# EAGLE board Robotic_Finger_Sensor-Panel (EAGLE 9.0.1), part 1 of 2
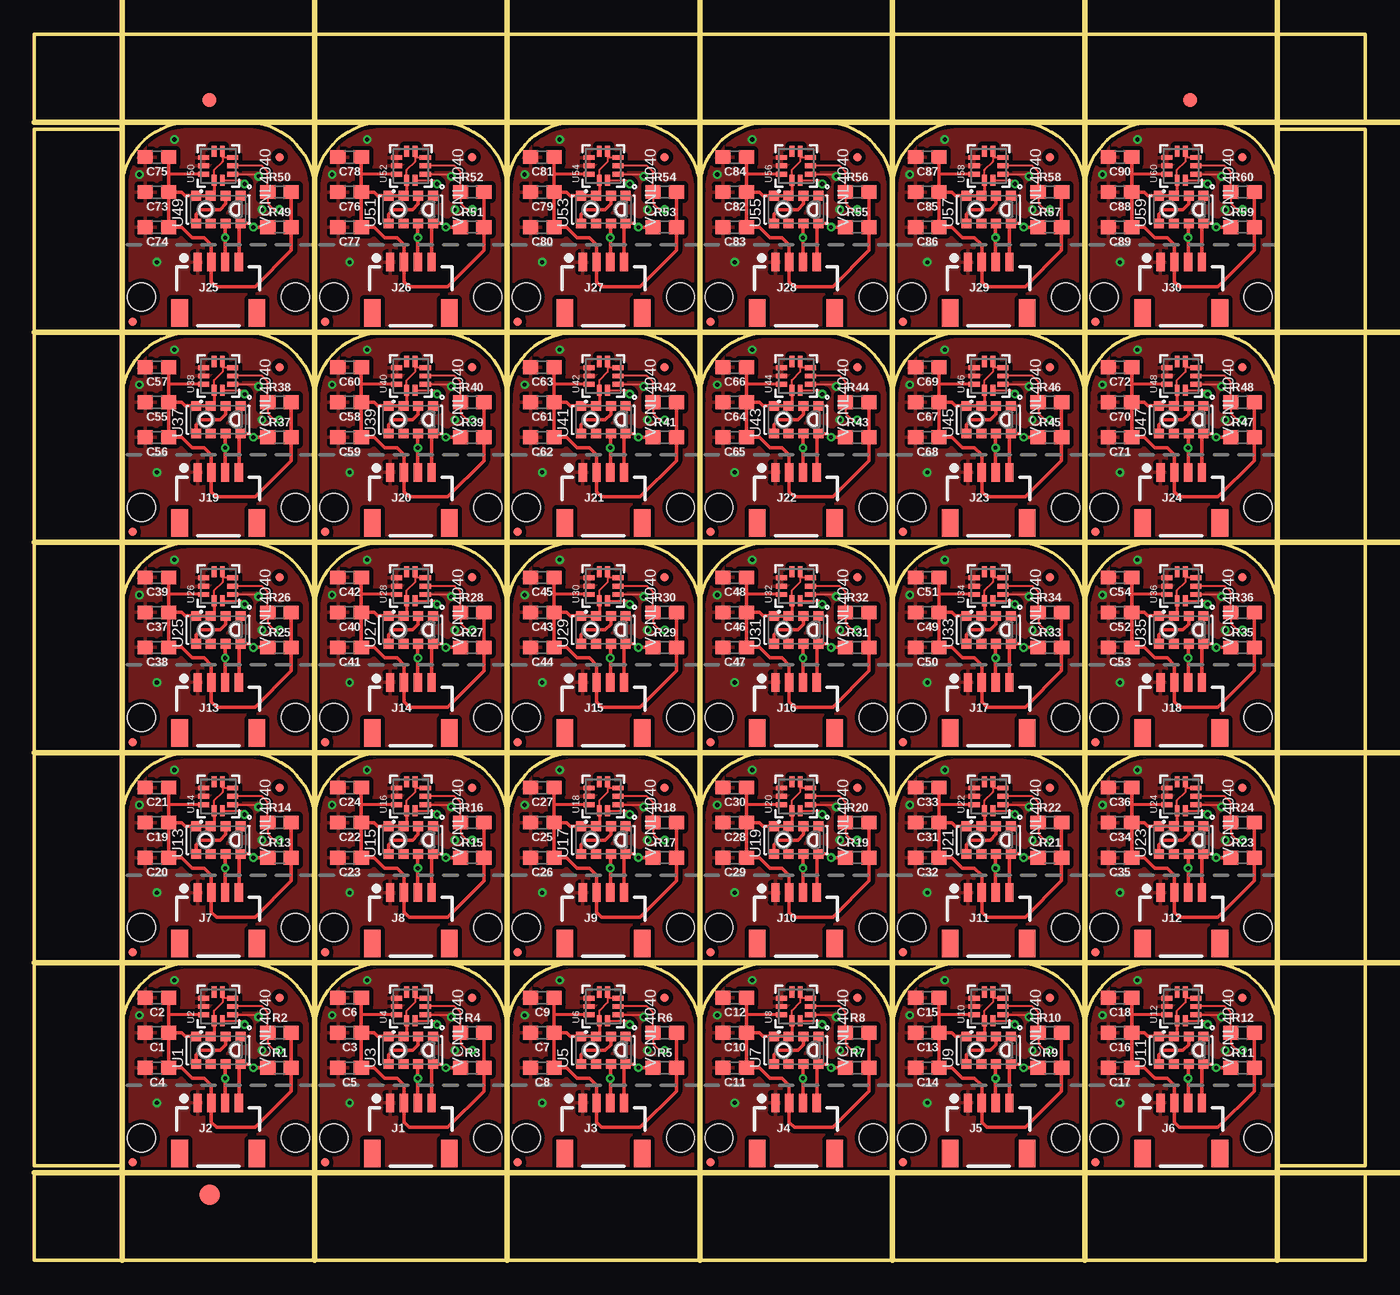
[diagram p0: board, top side]
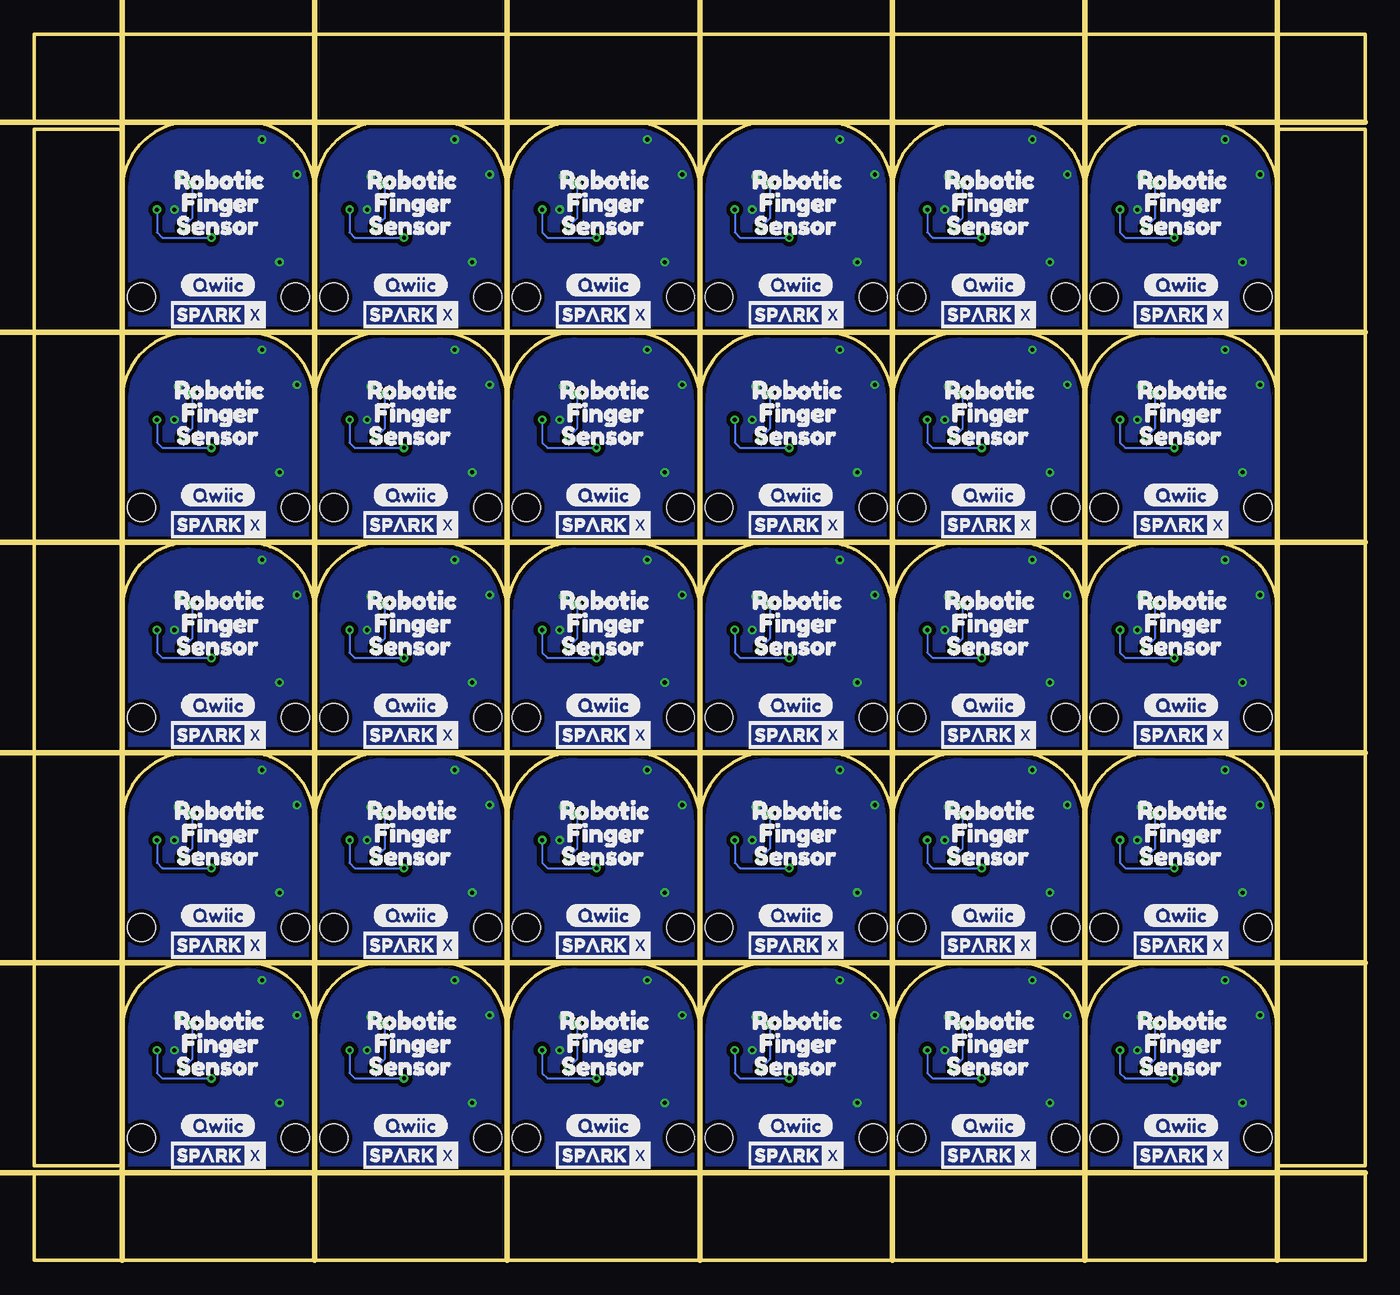
[diagram p1: board, bottom side, seen from below]

Size 96.52 x 88.9 mm. Coordinates in mm from the lower left corner, seen from the top.
Outline: 20.32,6.35 6.35,6.35 6.35,6.86
Outline: 6.35,6.86 6.35,16.51 arc-92 11.43,21.59 15.24,21.59 arc-92 20.32,16.51
Outline: 20.32,6.35 34.29,6.35
Outline: 20.32,6.35 20.32,16.51
Outline: 20.32,16.51 arc-92 25.4,21.59 29.21,21.59 arc-92 34.29,16.51
Outline: 34.29,6.35 48.26,6.35
Outline: 34.29,6.35 34.29,16.51
Outline: 34.29,16.51 arc-92 39.37,21.59 43.18,21.59 arc-92 48.26,16.51
Outline: 48.26,6.35 62.23,6.35
Outline: 48.26,6.35 48.26,16.51
Outline: 48.26,16.51 arc-92 53.34,21.59 57.15,21.59 arc-92 62.23,16.51
Outline: 62.23,6.35 76.2,6.35
Outline: 62.23,6.35 62.23,16.51
Outline: 62.23,16.51 arc-92 67.31,21.59 71.12,21.59 arc-92 76.2,16.51
Outline: 76.2,6.35 90.17,6.35 90.17,6.86
Outline: 76.2,6.35 76.2,16.51
Outline: 90.17,6.86 90.17,16.51 arc92 85.09,21.59 81.28,21.59 arc92 76.2,16.51
Outline: 20.32,21.59 6.35,21.59 6.35,31.75 arc-92 11.43,36.83 15.24,36.83 arc-92 20.32,31.75
Outline: 20.32,21.59 34.29,21.59
Outline: 20.32,21.59 20.32,31.75
Outline: 20.32,31.75 arc-92 25.4,36.83 29.21,36.83 arc-92 34.29,31.75
Outline: 34.29,21.59 48.26,21.59
Outline: 34.29,21.59 34.29,31.75
Outline: 34.29,31.75 arc-92 39.37,36.83 43.18,36.83 arc-92 48.26,31.75
Outline: 48.26,21.59 62.23,21.59
Outline: 48.26,21.59 48.26,31.75
Outline: 48.26,31.75 arc-92 53.34,36.83 57.15,36.83 arc-92 62.23,31.75
Outline: 62.23,21.59 76.2,21.59
Outline: 62.23,21.59 62.23,31.75
Outline: 62.23,31.75 arc-92 67.31,36.83 71.12,36.83 arc-92 76.2,31.75
Outline: 76.2,21.59 90.17,21.59 90.17,31.75 arc92 85.09,36.83 81.28,36.83 arc92 76.2,31.75
Outline: 76.2,21.59 76.2,31.75
Outline: 20.32,36.83 6.35,36.83 6.35,46.99 arc-92 11.43,52.07 15.24,52.07 arc-92 20.32,46.99
Outline: 20.32,36.83 34.29,36.83
Outline: 20.32,36.83 20.32,46.99
Outline: 20.32,46.99 arc-92 25.4,52.07 29.21,52.07 arc-92 34.29,46.99
Outline: 34.29,36.83 48.26,36.83
Outline: 34.29,36.83 34.29,46.99
Outline: 34.29,46.99 arc-92 39.37,52.07 43.18,52.07 arc-92 48.26,46.99
Outline: 48.26,36.83 62.23,36.83
Outline: 48.26,36.83 48.26,46.99
Outline: 48.26,46.99 arc-92 53.34,52.07 57.15,52.07 arc-92 62.23,46.99
Outline: 62.23,36.83 76.2,36.83
Outline: 62.23,36.83 62.23,46.99
Outline: 62.23,46.99 arc-92 67.31,52.07 71.12,52.07 arc-92 76.2,46.99
Outline: 76.2,36.83 90.17,36.83 90.17,46.99 arc92 85.09,52.07 81.28,52.07 arc92 76.2,46.99
Outline: 76.2,36.83 76.2,46.99
Outline: 20.32,52.07 6.35,52.07 6.35,62.23 arc-92 11.43,67.31 15.24,67.31 arc-92 20.32,62.23
Outline: 20.32,52.07 34.29,52.07
Outline: 20.32,52.07 20.32,62.23
Outline: 20.32,62.23 arc-92 25.4,67.31 29.21,67.31 arc-92 34.29,62.23
Outline: 34.29,52.07 48.26,52.07
Outline: 34.29,52.07 34.29,62.23
Outline: 34.29,62.23 arc-92 39.37,67.31 43.18,67.31 arc-92 48.26,62.23
Outline: 48.26,52.07 62.23,52.07
Outline: 48.26,52.07 48.26,62.23
Outline: 48.26,62.23 arc-92 53.34,67.31 57.15,67.31 arc-92 62.23,62.23
Outline: 62.23,52.07 76.2,52.07
Outline: 62.23,52.07 62.23,62.23
Outline: 62.23,62.23 arc-92 67.31,67.31 71.12,67.31 arc-92 76.2,62.23
Outline: 76.2,52.07 90.17,52.07 90.17,62.23 arc92 85.09,67.31 81.28,67.31 arc92 76.2,62.23
Outline: 76.2,52.07 76.2,62.23
Outline: 20.32,67.31 6.35,67.31 6.35,77.47 arc-92 11.43,82.55 15.24,82.55 arc-92 20.32,77.47
Outline: 20.32,67.31 34.29,67.31
Outline: 20.32,67.31 20.32,77.47
Outline: 20.32,77.47 arc-92 25.4,82.55 29.21,82.55 arc-92 34.29,77.47
Outline: 34.29,67.31 48.26,67.31
Outline: 34.29,67.31 34.29,77.47
Outline: 34.29,77.47 arc-92 39.37,82.55 43.18,82.55 arc-92 48.26,77.47
Outline: 48.26,67.31 62.23,67.31
Outline: 48.26,67.31 48.26,77.47
Outline: 48.26,77.47 arc-92 53.34,82.55 57.15,82.55 arc-92 62.23,77.47
Outline: 62.23,67.31 76.2,67.31
Outline: 62.23,67.31 62.23,77.47
Outline: 62.23,77.47 arc-92 67.31,82.55 71.12,82.55 arc-92 76.2,77.47
Outline: 76.2,67.31 90.17,67.31 90.17,77.47 arc92 85.09,82.55 81.28,82.55 arc92 76.2,77.47
Outline: 76.2,67.31 76.2,77.47
Outline: 90.17,6.86 96.52,6.86 96.52,82.04 90.17,82.04 90.17,6.86
Outline: 6.35,6.86 6.35,82.04 0,82.04 0,6.86 6.35,6.86
Outline: 0,6.35 96.52,6.35 96.52,0 0,0 0,6.35
Outline: 0,88.9 96.52,88.9 96.52,82.55 0,82.55 0,88.9
Copper layers (1*16): Top 0.035mm / dielectric 1.5mm / Bottom 0.035mm
Design rules "SparkFun-2-layer-PCBWay-LIMIT": minimum track width 6mil, minimum drill 0.3mm, track to track 6mil, track to pad 6mil, pad to pad 6mil, via to via 6mil, smd to smd 6mil, copper to edge 6mil, drill to drill 6mil, minimum pad ring 6mil, minimum via ring 6mil, stop-mask expansion 4mil, vias tented up to drill 25mil, thermal gap 10mil
Milling: 13 lines

## Footprints (pad centres in the part's own frame; a part is rotated, then mirrored left to right if it is on the bottom)
0603 = smd 1.1 x 1: 1 -0.85,0; 2 0.85,0
FIDUCIAL-1X2 = smd 1 x 1: 1 0,0
FIDUCIAL-1.5X3 = smd 1.5 x 1.5: 1 0,0
FIDUCIAL-MICRO = smd 0.635 x 0.635: 1 0,0
1X04_1MM_RA = smd 0.6 x 1.35: 1 -1.5,0; 2 -0.5,0; 3 0.5,0; 4 1.5,0 | smd 1.2 x 2: NC1 2.8,-3.675; NC2 -2.8,-3.675
VCNL4040 = smd 0.7 x 0.725: 1 1,-1.613; 2 1,-0.537; 3 1,0.537; 4 1,1.613; 5 -1,1.613; 6 -1,0.537; 7 -1,-0.537; 8 -1,-1.613
LPS25HB = smd 0.8 x 0.35: 1 -1.05,0.3; 2 -1.05,-0.3; 6 1.05,-0.3; 7 1.05,0.3 | smd 0.35 x 0.8: 3 -0.6,-1.05; 4 0,-1.05; 5 0.6,-1.05; 8 0.6,1.05; 9 0,1.05; 10 -0.6,1.05
STAND-OFF-#2 = hole 2.032: 0,0

## Placement (x,y rotation side)
C1  4.7uF  [0603]  8.89,16.51 180 top
C2  0.1uF  [0603]  8.89,19.05 180 top
C3  4.7uF  [0603]  22.86,16.51 180 top
C4  0.1uF  [0603]  8.89,13.97 180 top
C5  0.1uF  [0603]  22.86,13.97 180 top
C6  0.1uF  [0603]  22.86,19.05 180 top
C7  4.7uF  [0603]  36.83,16.51 180 top
C8  0.1uF  [0603]  36.83,13.97 180 top
C9  0.1uF  [0603]  36.83,19.05 180 top
C10  4.7uF  [0603]  50.8,16.51 180 top
C11  0.1uF  [0603]  50.8,13.97 180 top
C12  0.1uF  [0603]  50.8,19.05 180 top
C13  4.7uF  [0603]  64.77,16.51 180 top
C14  0.1uF  [0603]  64.77,13.97 180 top
C15  0.1uF  [0603]  64.77,19.05 180 top
C16  4.7uF  [0603]  78.74,16.51 180 top
C17  0.1uF  [0603]  78.74,13.97 180 top
C18  0.1uF  [0603]  78.74,19.05 180 top
C19  4.7uF  [0603]  8.89,31.75 180 top
C20  0.1uF  [0603]  8.89,29.21 180 top
C21  0.1uF  [0603]  8.89,34.29 180 top
C22  4.7uF  [0603]  22.86,31.75 180 top
C23  0.1uF  [0603]  22.86,29.21 180 top
C24  0.1uF  [0603]  22.86,34.29 180 top
C25  4.7uF  [0603]  36.83,31.75 180 top
C26  0.1uF  [0603]  36.83,29.21 180 top
C27  0.1uF  [0603]  36.83,34.29 180 top
C28  4.7uF  [0603]  50.8,31.75 180 top
C29  0.1uF  [0603]  50.8,29.21 180 top
C30  0.1uF  [0603]  50.8,34.29 180 top
C31  4.7uF  [0603]  64.77,31.75 180 top
C32  0.1uF  [0603]  64.77,29.21 180 top
C33  0.1uF  [0603]  64.77,34.29 180 top
C34  4.7uF  [0603]  78.74,31.75 180 top
C35  0.1uF  [0603]  78.74,29.21 180 top
C36  0.1uF  [0603]  78.74,34.29 180 top
C37  4.7uF  [0603]  8.89,46.99 180 top
C38  0.1uF  [0603]  8.89,44.45 180 top
C39  0.1uF  [0603]  8.89,49.53 180 top
C40  4.7uF  [0603]  22.86,46.99 180 top
C41  0.1uF  [0603]  22.86,44.45 180 top
C42  0.1uF  [0603]  22.86,49.53 180 top
C43  4.7uF  [0603]  36.83,46.99 180 top
C44  0.1uF  [0603]  36.83,44.45 180 top
C45  0.1uF  [0603]  36.83,49.53 180 top
C46  4.7uF  [0603]  50.8,46.99 180 top
C47  0.1uF  [0603]  50.8,44.45 180 top
C48  0.1uF  [0603]  50.8,49.53 180 top
C49  4.7uF  [0603]  64.77,46.99 180 top
C50  0.1uF  [0603]  64.77,44.45 180 top
C51  0.1uF  [0603]  64.77,49.53 180 top
C52  4.7uF  [0603]  78.74,46.99 180 top
C53  0.1uF  [0603]  78.74,44.45 180 top
C54  0.1uF  [0603]  78.74,49.53 180 top
C55  4.7uF  [0603]  8.89,62.23 180 top
C56  0.1uF  [0603]  8.89,59.69 180 top
C57  0.1uF  [0603]  8.89,64.77 180 top
C58  4.7uF  [0603]  22.86,62.23 180 top
C59  0.1uF  [0603]  22.86,59.69 180 top
C60  0.1uF  [0603]  22.86,64.77 180 top
C61  4.7uF  [0603]  36.83,62.23 180 top
C62  0.1uF  [0603]  36.83,59.69 180 top
C63  0.1uF  [0603]  36.83,64.77 180 top
C64  4.7uF  [0603]  50.8,62.23 180 top
C65  0.1uF  [0603]  50.8,59.69 180 top
C66  0.1uF  [0603]  50.8,64.77 180 top
C67  4.7uF  [0603]  64.77,62.23 180 top
C68  0.1uF  [0603]  64.77,59.69 180 top
C69  0.1uF  [0603]  64.77,64.77 180 top
C70  4.7uF  [0603]  78.74,62.23 180 top
C71  0.1uF  [0603]  78.74,59.69 180 top
C72  0.1uF  [0603]  78.74,64.77 180 top
C73  4.7uF  [0603]  8.89,77.47 180 top
C74  0.1uF  [0603]  8.89,74.93 180 top
C75  0.1uF  [0603]  8.89,80.01 180 top
C76  4.7uF  [0603]  22.86,77.47 180 top
C77  0.1uF  [0603]  22.86,74.93 180 top
C78  0.1uF  [0603]  22.86,80.01 180 top
C79  4.7uF  [0603]  36.83,77.47 180 top
C80  0.1uF  [0603]  36.83,74.93 180 top
C81  0.1uF  [0603]  36.83,80.01 180 top
C82  4.7uF  [0603]  50.8,77.47 180 top
C83  0.1uF  [0603]  50.8,74.93 180 top
C84  0.1uF  [0603]  50.8,80.01 180 top
C85  4.7uF  [0603]  64.77,77.47 180 top
C86  0.1uF  [0603]  64.77,74.93 180 top
C87  0.1uF  [0603]  64.77,80.01 180 top
C88  4.7uF  [0603]  78.74,77.47 180 top
C89  0.1uF  [0603]  78.74,74.93 180 top
C90  0.1uF  [0603]  78.74,80.01 180 top
E$1  [FIDUCIAL-1X2]  12.7,84.14 0 top
E$2  [FIDUCIAL-1X2]  83.82,84.14 0 top
E$3  [FIDUCIAL-1.5X3]  12.7,4.76 0 top
FD1  FIDUCIALUFIDUCIAL  [FIDUCIAL-MICRO]  17.78,19.05 0 top
FD2  FIDUCIALUFIDUCIAL  [FIDUCIAL-MICRO]  7.11,7.11 0 top
FD3  FIDUCIALUFIDUCIAL  [FIDUCIAL-MICRO]  31.75,19.05 0 top
FD4  FIDUCIALUFIDUCIAL  [FIDUCIAL-MICRO]  21.08,7.11 0 top
FD5  FIDUCIALUFIDUCIAL  [FIDUCIAL-MICRO]  45.72,19.05 0 top
FD6  FIDUCIALUFIDUCIAL  [FIDUCIAL-MICRO]  35.05,7.11 0 top
FD7  FIDUCIALUFIDUCIAL  [FIDUCIAL-MICRO]  59.69,19.05 0 top
FD8  FIDUCIALUFIDUCIAL  [FIDUCIAL-MICRO]  49.02,7.11 0 top
FD9  FIDUCIALUFIDUCIAL  [FIDUCIAL-MICRO]  73.66,19.05 0 top
FD10  FIDUCIALUFIDUCIAL  [FIDUCIAL-MICRO]  62.99,7.11 0 top
FD11  FIDUCIALUFIDUCIAL  [FIDUCIAL-MICRO]  87.63,19.05 0 top
FD12  FIDUCIALUFIDUCIAL  [FIDUCIAL-MICRO]  76.96,7.11 0 top
FD13  FIDUCIALUFIDUCIAL  [FIDUCIAL-MICRO]  17.78,34.29 0 top
FD14  FIDUCIALUFIDUCIAL  [FIDUCIAL-MICRO]  7.11,22.35 0 top
FD15  FIDUCIALUFIDUCIAL  [FIDUCIAL-MICRO]  31.75,34.29 0 top
FD16  FIDUCIALUFIDUCIAL  [FIDUCIAL-MICRO]  21.08,22.35 0 top
FD17  FIDUCIALUFIDUCIAL  [FIDUCIAL-MICRO]  45.72,34.29 0 top
FD18  FIDUCIALUFIDUCIAL  [FIDUCIAL-MICRO]  35.05,22.35 0 top
FD19  FIDUCIALUFIDUCIAL  [FIDUCIAL-MICRO]  59.69,34.29 0 top
FD20  FIDUCIALUFIDUCIAL  [FIDUCIAL-MICRO]  49.02,22.35 0 top
FD21  FIDUCIALUFIDUCIAL  [FIDUCIAL-MICRO]  73.66,34.29 0 top
FD22  FIDUCIALUFIDUCIAL  [FIDUCIAL-MICRO]  62.99,22.35 0 top
FD23  FIDUCIALUFIDUCIAL  [FIDUCIAL-MICRO]  87.63,34.29 0 top
FD24  FIDUCIALUFIDUCIAL  [FIDUCIAL-MICRO]  76.96,22.35 0 top
FD25  FIDUCIALUFIDUCIAL  [FIDUCIAL-MICRO]  17.78,49.53 0 top
FD26  FIDUCIALUFIDUCIAL  [FIDUCIAL-MICRO]  7.11,37.59 0 top
FD27  FIDUCIALUFIDUCIAL  [FIDUCIAL-MICRO]  31.75,49.53 0 top
FD28  FIDUCIALUFIDUCIAL  [FIDUCIAL-MICRO]  21.08,37.59 0 top
FD29  FIDUCIALUFIDUCIAL  [FIDUCIAL-MICRO]  45.72,49.53 0 top
FD30  FIDUCIALUFIDUCIAL  [FIDUCIAL-MICRO]  35.05,37.59 0 top
FD31  FIDUCIALUFIDUCIAL  [FIDUCIAL-MICRO]  59.69,49.53 0 top
FD32  FIDUCIALUFIDUCIAL  [FIDUCIAL-MICRO]  49.02,37.59 0 top
FD33  FIDUCIALUFIDUCIAL  [FIDUCIAL-MICRO]  73.66,49.53 0 top
FD34  FIDUCIALUFIDUCIAL  [FIDUCIAL-MICRO]  62.99,37.59 0 top
FD35  FIDUCIALUFIDUCIAL  [FIDUCIAL-MICRO]  87.63,49.53 0 top
FD36  FIDUCIALUFIDUCIAL  [FIDUCIAL-MICRO]  76.96,37.59 0 top
FD37  FIDUCIALUFIDUCIAL  [FIDUCIAL-MICRO]  17.78,64.77 0 top
FD38  FIDUCIALUFIDUCIAL  [FIDUCIAL-MICRO]  7.11,52.83 0 top
FD39  FIDUCIALUFIDUCIAL  [FIDUCIAL-MICRO]  31.75,64.77 0 top
FD40  FIDUCIALUFIDUCIAL  [FIDUCIAL-MICRO]  21.08,52.83 0 top
FD41  FIDUCIALUFIDUCIAL  [FIDUCIAL-MICRO]  45.72,64.77 0 top
FD42  FIDUCIALUFIDUCIAL  [FIDUCIAL-MICRO]  35.05,52.83 0 top
FD43  FIDUCIALUFIDUCIAL  [FIDUCIAL-MICRO]  59.69,64.77 0 top
FD44  FIDUCIALUFIDUCIAL  [FIDUCIAL-MICRO]  49.02,52.83 0 top
FD45  FIDUCIALUFIDUCIAL  [FIDUCIAL-MICRO]  73.66,64.77 0 top
FD46  FIDUCIALUFIDUCIAL  [FIDUCIAL-MICRO]  62.99,52.83 0 top
FD47  FIDUCIALUFIDUCIAL  [FIDUCIAL-MICRO]  87.63,64.77 0 top
FD48  FIDUCIALUFIDUCIAL  [FIDUCIAL-MICRO]  76.96,52.83 0 top
FD49  FIDUCIALUFIDUCIAL  [FIDUCIAL-MICRO]  17.78,80.01 0 top
FD50  FIDUCIALUFIDUCIAL  [FIDUCIAL-MICRO]  7.11,68.07 0 top
FD51  FIDUCIALUFIDUCIAL  [FIDUCIAL-MICRO]  31.75,80.01 0 top
FD52  FIDUCIALUFIDUCIAL  [FIDUCIAL-MICRO]  21.08,68.07 0 top
FD53  FIDUCIALUFIDUCIAL  [FIDUCIAL-MICRO]  45.72,80.01 0 top
FD54  FIDUCIALUFIDUCIAL  [FIDUCIAL-MICRO]  35.05,68.07 0 top
FD55  FIDUCIALUFIDUCIAL  [FIDUCIAL-MICRO]  59.69,80.01 0 top
FD56  FIDUCIALUFIDUCIAL  [FIDUCIAL-MICRO]  49.02,68.07 0 top
FD57  FIDUCIALUFIDUCIAL  [FIDUCIAL-MICRO]  73.66,80.01 0 top
FD58  FIDUCIALUFIDUCIAL  [FIDUCIAL-MICRO]  62.99,68.07 0 top
FD59  FIDUCIALUFIDUCIAL  [FIDUCIAL-MICRO]  87.63,80.01 0 top
FD60  FIDUCIALUFIDUCIAL  [FIDUCIAL-MICRO]  76.96,68.07 0 top
J1  [1X04_1MM_RA]  27.3,11.43 0 top
J2  [1X04_1MM_RA]  13.34,11.43 0 top
J3  [1X04_1MM_RA]  41.27,11.43 0 top
J4  [1X04_1MM_RA]  55.25,11.43 0 top
J5  [1X04_1MM_RA]  69.22,11.43 0 top
J6  [1X04_1MM_RA]  83.18,11.43 0 top
J7  [1X04_1MM_RA]  13.34,26.67 0 top
J8  [1X04_1MM_RA]  27.3,26.67 0 top
J9  [1X04_1MM_RA]  41.27,26.67 0 top
J10  [1X04_1MM_RA]  55.25,26.67 0 top
J11  [1X04_1MM_RA]  69.22,26.67 0 top
J12  [1X04_1MM_RA]  83.18,26.67 0 top
J13  [1X04_1MM_RA]  13.34,41.91 0 top
J14  [1X04_1MM_RA]  27.3,41.91 0 top
J15  [1X04_1MM_RA]  41.27,41.91 0 top
J16  [1X04_1MM_RA]  55.25,41.91 0 top
J17  [1X04_1MM_RA]  69.22,41.91 0 top
J18  [1X04_1MM_RA]  83.18,41.91 0 top
J19  [1X04_1MM_RA]  13.34,57.15 0 top
J20  [1X04_1MM_RA]  27.3,57.15 0 top
J21  [1X04_1MM_RA]  41.27,57.15 0 top
J22  [1X04_1MM_RA]  55.25,57.15 0 top
J23  [1X04_1MM_RA]  69.22,57.15 0 top
J24  [1X04_1MM_RA]  83.18,57.15 0 top
J25  [1X04_1MM_RA]  13.34,72.39 0 top
J26  [1X04_1MM_RA]  27.3,72.39 0 top
J27  [1X04_1MM_RA]  41.27,72.39 0 top
J28  [1X04_1MM_RA]  55.25,72.39 0 top
J29  [1X04_1MM_RA]  69.22,72.39 0 top
J30  [1X04_1MM_RA]  83.18,72.39 0 top
R1  2.2k  [0603]  17.78,13.97 0 top
R2  2.2k  [0603]  17.78,16.51 0 top
R3  2.2k  [0603]  31.75,13.97 0 top
R4  2.2k  [0603]  31.75,16.51 0 top
R5  2.2k  [0603]  45.72,13.97 0 top
R6  2.2k  [0603]  45.72,16.51 0 top
R7  2.2k  [0603]  59.69,13.97 0 top
R8  2.2k  [0603]  59.69,16.51 0 top
R9  2.2k  [0603]  73.66,13.97 0 top
R10  2.2k  [0603]  73.66,16.51 0 top
R11  2.2k  [0603]  87.63,13.97 0 top
R12  2.2k  [0603]  87.63,16.51 0 top
R13  2.2k  [0603]  17.78,29.21 0 top
R14  2.2k  [0603]  17.78,31.75 0 top
R15  2.2k  [0603]  31.75,29.21 0 top
R16  2.2k  [0603]  31.75,31.75 0 top
R17  2.2k  [0603]  45.72,29.21 0 top
R18  2.2k  [0603]  45.72,31.75 0 top
R19  2.2k  [0603]  59.69,29.21 0 top
R20  2.2k  [0603]  59.69,31.75 0 top
R21  2.2k  [0603]  73.66,29.21 0 top
R22  2.2k  [0603]  73.66,31.75 0 top
R23  2.2k  [0603]  87.63,29.21 0 top
R24  2.2k  [0603]  87.63,31.75 0 top
R25  2.2k  [0603]  17.78,44.45 0 top
R26  2.2k  [0603]  17.78,46.99 0 top
R27  2.2k  [0603]  31.75,44.45 0 top
R28  2.2k  [0603]  31.75,46.99 0 top
R29  2.2k  [0603]  45.72,44.45 0 top
R30  2.2k  [0603]  45.72,46.99 0 top
R31  2.2k  [0603]  59.69,44.45 0 top
R32  2.2k  [0603]  59.69,46.99 0 top
R33  2.2k  [0603]  73.66,44.45 0 top
R34  2.2k  [0603]  73.66,46.99 0 top
R35  2.2k  [0603]  87.63,44.45 0 top
R36  2.2k  [0603]  87.63,46.99 0 top
R37  2.2k  [0603]  17.78,59.69 0 top
R38  2.2k  [0603]  17.78,62.23 0 top
R39  2.2k  [0603]  31.75,59.69 0 top
R40  2.2k  [0603]  31.75,62.23 0 top
R41  2.2k  [0603]  45.72,59.69 0 top
R42  2.2k  [0603]  45.72,62.23 0 top
R43  2.2k  [0603]  59.69,59.69 0 top
R44  2.2k  [0603]  59.69,62.23 0 top
R45  2.2k  [0603]  73.66,59.69 0 top
R46  2.2k  [0603]  73.66,62.23 0 top
R47  2.2k  [0603]  87.63,59.69 0 top
R48  2.2k  [0603]  87.63,62.23 0 top
R49  2.2k  [0603]  17.78,74.93 0 top
R50  2.2k  [0603]  17.78,77.47 0 top
R51  2.2k  [0603]  31.75,74.93 0 top
R52  2.2k  [0603]  31.75,77.47 0 top
R53  2.2k  [0603]  45.72,74.93 0 top
R54  2.2k  [0603]  45.72,77.47 0 top
R55  2.2k  [0603]  59.69,74.93 0 top
R56  2.2k  [0603]  59.69,77.47 0 top
R57  2.2k  [0603]  73.66,74.93 0 top
R58  2.2k  [0603]  73.66,77.47 0 top
R59  2.2k  [0603]  87.63,74.93 0 top
R60  2.2k  [0603]  87.63,77.47 0 top
U1  VCNL4040  [VCNL4040]  13.34,15.24 90 top
U2  LPS25HB  [LPS25HB]  13.34,18.41 90 top
U3  VCNL4040  [VCNL4040]  27.3,15.24 90 top
U4  LPS25HB  [LPS25HB]  27.3,18.41 90 top
U5  VCNL4040  [VCNL4040]  41.27,15.24 90 top
U6  LPS25HB  [LPS25HB]  41.27,18.41 90 top
U7  VCNL4040  [VCNL4040]  55.25,15.24 90 top
U8  LPS25HB  [LPS25HB]  55.25,18.41 90 top
U9  VCNL4040  [VCNL4040]  69.22,15.24 90 top
U10  LPS25HB  [LPS25HB]  69.22,18.41 90 top
U11  VCNL4040  [VCNL4040]  83.18,15.24 90 top
U12  LPS25HB  [LPS25HB]  83.18,18.41 90 top
U13  VCNL4040  [VCNL4040]  13.34,30.48 90 top
U14  LPS25HB  [LPS25HB]  13.34,33.66 90 top
U15  VCNL4040  [VCNL4040]  27.3,30.48 90 top
U16  LPS25HB  [LPS25HB]  27.3,33.66 90 top
U17  VCNL4040  [VCNL4040]  41.27,30.48 90 top
U18  LPS25HB  [LPS25HB]  41.27,33.66 90 top
U19  VCNL4040  [VCNL4040]  55.25,30.48 90 top
U20  LPS25HB  [LPS25HB]  55.25,33.66 90 top
U21  VCNL4040  [VCNL4040]  69.22,30.48 90 top
U22  LPS25HB  [LPS25HB]  69.22,33.66 90 top
U23  VCNL4040  [VCNL4040]  83.18,30.48 90 top
U24  LPS25HB  [LPS25HB]  83.18,33.66 90 top
U25  VCNL4040  [VCNL4040]  13.34,45.72 90 top
U26  LPS25HB  [LPS25HB]  13.34,48.9 90 top
U27  VCNL4040  [VCNL4040]  27.3,45.72 90 top
U28  LPS25HB  [LPS25HB]  27.3,48.9 90 top
U29  VCNL4040  [VCNL4040]  41.27,45.72 90 top
U30  LPS25HB  [LPS25HB]  41.27,48.9 90 top
U31  VCNL4040  [VCNL4040]  55.25,45.72 90 top
U32  LPS25HB  [LPS25HB]  55.25,48.9 90 top
U33  VCNL4040  [VCNL4040]  69.22,45.72 90 top
U34  LPS25HB  [LPS25HB]  69.22,48.9 90 top
U35  VCNL4040  [VCNL4040]  83.18,45.72 90 top
U36  LPS25HB  [LPS25HB]  83.18,48.9 90 top
U37  VCNL4040  [VCNL4040]  13.34,60.96 90 top
U38  LPS25HB  [LPS25HB]  13.34,64.13 90 top
U39  VCNL4040  [VCNL4040]  27.3,60.96 90 top
U40  LPS25HB  [LPS25HB]  27.3,64.13 90 top
U41  VCNL4040  [VCNL4040]  41.27,60.96 90 top
U42  LPS25HB  [LPS25HB]  41.27,64.13 90 top
U43  VCNL4040  [VCNL4040]  55.25,60.96 90 top
U44  LPS25HB  [LPS25HB]  55.25,64.13 90 top
U45  VCNL4040  [VCNL4040]  69.22,60.96 90 top
U46  LPS25HB  [LPS25HB]  69.22,64.13 90 top
U47  VCNL4040  [VCNL4040]  83.18,60.96 90 top
U48  LPS25HB  [LPS25HB]  83.18,64.13 90 top
U49  VCNL4040  [VCNL4040]  13.34,76.2 90 top
U50  LPS25HB  [LPS25HB]  13.34,79.38 90 top
U51  VCNL4040  [VCNL4040]  27.3,76.2 90 top
U52  LPS25HB  [LPS25HB]  27.3,79.38 90 top
U53  VCNL4040  [VCNL4040]  41.27,76.2 90 top
U54  LPS25HB  [LPS25HB]  41.27,79.38 90 top
U55  VCNL4040  [VCNL4040]  55.25,76.2 90 top
U56  LPS25HB  [LPS25HB]  55.25,79.38 90 top
U57  VCNL4040  [VCNL4040]  69.22,76.2 90 top
U58  LPS25HB  [LPS25HB]  69.22,79.38 90 top
U59  VCNL4040  [VCNL4040]  83.18,76.2 90 top
U60  LPS25HB  [LPS25HB]  83.18,79.38 90 top
U$1  SPARKX-LOGO3  [SPARKX-SMALL]  27.3,7.62 0 bottom
U$2  SPARKX-LOGO3  [SPARKX-SMALL]  13.34,7.62 0 bottom
U$3  STAND-OFF  [STAND-OFF-#2]  7.75,8.89 0 top
U$4  STAND-OFF  [STAND-OFF-#2]  18.92,8.89 0 top
U$5  STAND-OFF  [STAND-OFF-#2]  21.72,8.89 0 top
U$6  [ROBOTIC0]  17.65,17.4 0 bottom
U$7  [SENSOR2]  17.53,14.1 0 bottom
U$8  STAND-OFF  [STAND-OFF-#2]  32.89,8.89 0 top
U$9  [FINGER0]  17.14,15.75 0 bottom
U$10  [(QWIIC)]  30.1,9.78 0 bottom
U$11  [(QWIIC)]  16.13,9.78 0 bottom
U$12  [ROBOTIC0]  31.62,17.4 0 bottom
U$13  [SENSOR2]  31.5,14.1 0 bottom
U$14  [FINGER0]  31.12,15.75 0 bottom
U$15  SPARKX-LOGO3  [SPARKX-SMALL]  41.27,7.62 0 bottom
U$16  STAND-OFF  [STAND-OFF-#2]  35.69,8.89 0 top
U$17  STAND-OFF  [STAND-OFF-#2]  46.86,8.89 0 top
U$18  [(QWIIC)]  44.07,9.78 0 bottom
U$19  [ROBOTIC0]  45.59,17.4 0 bottom
U$20  [SENSOR2]  45.47,14.1 0 bottom
U$21  [FINGER0]  45.09,15.75 0 bottom
U$22  SPARKX-LOGO3  [SPARKX-SMALL]  55.25,7.62 0 bottom
U$23  STAND-OFF  [STAND-OFF-#2]  49.66,8.89 0 top
U$24  STAND-OFF  [STAND-OFF-#2]  60.83,8.89 0 top
U$25  [(QWIIC)]  58.04,9.78 0 bottom
U$26  [ROBOTIC0]  59.56,17.4 0 bottom
U$27  [SENSOR2]  59.44,14.1 0 bottom
U$28  [FINGER0]  59.05,15.75 0 bottom
U$29  SPARKX-LOGO3  [SPARKX-SMALL]  69.22,7.62 0 bottom
U$30  STAND-OFF  [STAND-OFF-#2]  63.63,8.89 0 top
U$31  STAND-OFF  [STAND-OFF-#2]  74.8,8.89 0 top
U$32  [(QWIIC)]  72.01,9.78 0 bottom
U$33  [ROBOTIC0]  73.53,17.4 0 bottom
U$34  [SENSOR2]  73.41,14.1 0 bottom
U$35  [FINGER0]  73.02,15.75 0 bottom
U$36  SPARKX-LOGO3  [SPARKX-SMALL]  83.18,7.62 0 bottom
U$37  STAND-OFF  [STAND-OFF-#2]  77.6,8.89 0 top
U$38  STAND-OFF  [STAND-OFF-#2]  88.77,8.89 0 top
U$39  [(QWIIC)]  85.98,9.78 0 bottom
U$40  [ROBOTIC0]  87.5,17.4 0 bottom
U$41  [SENSOR2]  87.38,14.1 0 bottom
U$42  [FINGER0]  86.99,15.75 0 bottom
U$43  SPARKX-LOGO3  [SPARKX-SMALL]  13.34,22.86 0 bottom
U$44  STAND-OFF  [STAND-OFF-#2]  7.75,24.13 0 top
U$45  STAND-OFF  [STAND-OFF-#2]  18.92,24.13 0 top
U$46  [(QWIIC)]  16.13,25.02 0 bottom
U$47  [ROBOTIC0]  17.65,32.64 0 bottom
U$48  [SENSOR2]  17.53,29.34 0 bottom
U$49  [FINGER0]  17.14,30.99 0 bottom
U$50  SPARKX-LOGO3  [SPARKX-SMALL]  27.3,22.86 0 bottom
U$51  STAND-OFF  [STAND-OFF-#2]  21.72,24.13 0 top
U$52  STAND-OFF  [STAND-OFF-#2]  32.89,24.13 0 top
U$53  [(QWIIC)]  30.1,25.02 0 bottom
U$54  [ROBOTIC0]  31.62,32.64 0 bottom
U$55  [SENSOR2]  31.5,29.34 0 bottom
U$56  [FINGER0]  31.12,30.99 0 bottom
U$57  SPARKX-LOGO3  [SPARKX-SMALL]  41.27,22.86 0 bottom
U$58  STAND-OFF  [STAND-OFF-#2]  35.69,24.13 0 top
U$59  STAND-OFF  [STAND-OFF-#2]  46.86,24.13 0 top
U$60  [(QWIIC)]  44.07,25.02 0 bottom
U$61  [ROBOTIC0]  45.59,32.64 0 bottom
U$62  [SENSOR2]  45.47,29.34 0 bottom
U$63  [FINGER0]  45.09,30.99 0 bottom
U$64  SPARKX-LOGO3  [SPARKX-SMALL]  55.25,22.86 0 bottom
U$65  STAND-OFF  [STAND-OFF-#2]  49.66,24.13 0 top
U$66  STAND-OFF  [STAND-OFF-#2]  60.83,24.13 0 top
U$67  [(QWIIC)]  58.04,25.02 0 bottom
U$68  [ROBOTIC0]  59.56,32.64 0 bottom
U$69  [SENSOR2]  59.44,29.34 0 bottom
U$70  [FINGER0]  59.05,30.99 0 bottom
U$71  SPARKX-LOGO3  [SPARKX-SMALL]  69.22,22.86 0 bottom
U$72  STAND-OFF  [STAND-OFF-#2]  63.63,24.13 0 top
U$73  STAND-OFF  [STAND-OFF-#2]  74.8,24.13 0 top
U$74  [(QWIIC)]  72.01,25.02 0 bottom
U$75  [ROBOTIC0]  73.53,32.64 0 bottom
U$76  [SENSOR2]  73.41,29.34 0 bottom
U$77  [FINGER0]  73.02,30.99 0 bottom
U$78  SPARKX-LOGO3  [SPARKX-SMALL]  83.18,22.86 0 bottom
U$79  STAND-OFF  [STAND-OFF-#2]  77.6,24.13 0 top
U$80  STAND-OFF  [STAND-OFF-#2]  88.77,24.13 0 top
U$81  [(QWIIC)]  85.98,25.02 0 bottom
U$82  [ROBOTIC0]  87.5,32.64 0 bottom
U$83  [SENSOR2]  87.38,29.34 0 bottom
U$84  [FINGER0]  86.99,30.99 0 bottom
U$85  SPARKX-LOGO3  [SPARKX-SMALL]  13.34,38.1 0 bottom
U$86  STAND-OFF  [STAND-OFF-#2]  7.75,39.37 0 top
U$87  STAND-OFF  [STAND-OFF-#2]  18.92,39.37 0 top
U$88  [(QWIIC)]  16.13,40.26 0 bottom
U$89  [ROBOTIC0]  17.65,47.88 0 bottom
U$90  [SENSOR2]  17.53,44.58 0 bottom
U$91  [FINGER0]  17.14,46.23 0 bottom
U$92  SPARKX-LOGO3  [SPARKX-SMALL]  27.3,38.1 0 bottom
U$93  STAND-OFF  [STAND-OFF-#2]  21.72,39.37 0 top
U$94  STAND-OFF  [STAND-OFF-#2]  32.89,39.37 0 top
U$95  [(QWIIC)]  30.1,40.26 0 bottom
U$96  [ROBOTIC0]  31.62,47.88 0 bottom
U$97  [SENSOR2]  31.5,44.58 0 bottom
U$98  [FINGER0]  31.12,46.23 0 bottom
U$99  SPARKX-LOGO3  [SPARKX-SMALL]  41.27,38.1 0 bottom
U$100  STAND-OFF  [STAND-OFF-#2]  35.69,39.37 0 top
U$101  STAND-OFF  [STAND-OFF-#2]  46.86,39.37 0 top
U$102  [(QWIIC)]  44.07,40.26 0 bottom
U$103  [ROBOTIC0]  45.59,47.88 0 bottom
U$104  [SENSOR2]  45.47,44.58 0 bottom
U$105  [FINGER0]  45.09,46.23 0 bottom
U$106  SPARKX-LOGO3  [SPARKX-SMALL]  55.25,38.1 0 bottom
U$107  STAND-OFF  [STAND-OFF-#2]  49.66,39.37 0 top
U$108  STAND-OFF  [STAND-OFF-#2]  60.83,39.37 0 top
U$109  [(QWIIC)]  58.04,40.26 0 bottom
U$110  [ROBOTIC0]  59.56,47.88 0 bottom
U$111  [SENSOR2]  59.44,44.58 0 bottom
U$112  [FINGER0]  59.05,46.23 0 bottom
U$113  SPARKX-LOGO3  [SPARKX-SMALL]  69.22,38.1 0 bottom
U$114  STAND-OFF  [STAND-OFF-#2]  63.63,39.37 0 top
U$115  STAND-OFF  [STAND-OFF-#2]  74.8,39.37 0 top
U$116  [(QWIIC)]  72.01,40.26 0 bottom
U$117  [ROBOTIC0]  73.53,47.88 0 bottom
U$118  [SENSOR2]  73.41,44.58 0 bottom
U$119  [FINGER0]  73.02,46.23 0 bottom
U$120  SPARKX-LOGO3  [SPARKX-SMALL]  83.18,38.1 0 bottom
U$121  STAND-OFF  [STAND-OFF-#2]  77.6,39.37 0 top
U$122  STAND-OFF  [STAND-OFF-#2]  88.77,39.37 0 top
U$123  [(QWIIC)]  85.98,40.26 0 bottom
U$124  [ROBOTIC0]  87.5,47.88 0 bottom
U$125  [SENSOR2]  87.38,44.58 0 bottom
U$126  [FINGER0]  86.99,46.23 0 bottom
U$127  SPARKX-LOGO3  [SPARKX-SMALL]  13.34,53.34 0 bottom
U$128  STAND-OFF  [STAND-OFF-#2]  7.75,54.61 0 top
U$129  STAND-OFF  [STAND-OFF-#2]  18.92,54.61 0 top
U$130  [(QWIIC)]  16.13,55.5 0 bottom
U$131  [ROBOTIC0]  17.65,63.12 0 bottom
U$132  [SENSOR2]  17.53,59.82 0 bottom
U$133  [FINGER0]  17.14,61.47 0 bottom
U$134  SPARKX-LOGO3  [SPARKX-SMALL]  27.3,53.34 0 bottom
U$135  STAND-OFF  [STAND-OFF-#2]  21.72,54.61 0 top
U$136  STAND-OFF  [STAND-OFF-#2]  32.89,54.61 0 top
U$137  [(QWIIC)]  30.1,55.5 0 bottom
U$138  [ROBOTIC0]  31.62,63.12 0 bottom
U$139  [SENSOR2]  31.5,59.82 0 bottom
U$140  [FINGER0]  31.12,61.47 0 bottom
U$141  SPARKX-LOGO3  [SPARKX-SMALL]  41.27,53.34 0 bottom
U$142  STAND-OFF  [STAND-OFF-#2]  35.69,54.61 0 top
U$143  STAND-OFF  [STAND-OFF-#2]  46.86,54.61 0 top
U$144  [(QWIIC)]  44.07,55.5 0 bottom
U$145  [ROBOTIC0]  45.59,63.12 0 bottom
U$146  [SENSOR2]  45.47,59.82 0 bottom
U$147  [FINGER0]  45.09,61.47 0 bottom
U$148  SPARKX-LOGO3  [SPARKX-SMALL]  55.25,53.34 0 bottom
U$149  STAND-OFF  [STAND-OFF-#2]  49.66,54.61 0 top
U$150  STAND-OFF  [STAND-OFF-#2]  60.83,54.61 0 top
U$151  [(QWIIC)]  58.04,55.5 0 bottom
U$152  [ROBOTIC0]  59.56,63.12 0 bottom
U$153  [SENSOR2]  59.44,59.82 0 bottom
U$154  [FINGER0]  59.05,61.47 0 bottom
U$155  SPARKX-LOGO3  [SPARKX-SMALL]  69.22,53.34 0 bottom
U$156  STAND-OFF  [STAND-OFF-#2]  63.63,54.61 0 top
U$157  STAND-OFF  [STAND-OFF-#2]  74.8,54.61 0 top
U$158  [(QWIIC)]  72.01,55.5 0 bottom
U$159  [ROBOTIC0]  73.53,63.12 0 bottom
U$160  [SENSOR2]  73.41,59.82 0 bottom
U$161  [FINGER0]  73.02,61.47 0 bottom
U$162  SPARKX-LOGO3  [SPARKX-SMALL]  83.18,53.34 0 bottom
U$163  STAND-OFF  [STAND-OFF-#2]  77.6,54.61 0 top
U$164  STAND-OFF  [STAND-OFF-#2]  88.77,54.61 0 top
U$165  [(QWIIC)]  85.98,55.5 0 bottom
U$166  [ROBOTIC0]  87.5,63.12 0 bottom
U$167  [SENSOR2]  87.38,59.82 0 bottom
U$168  [FINGER0]  86.99,61.47 0 bottom
U$169  SPARKX-LOGO3  [SPARKX-SMALL]  13.34,68.58 0 bottom
U$170  STAND-OFF  [STAND-OFF-#2]  7.75,69.85 0 top
U$171  STAND-OFF  [STAND-OFF-#2]  18.92,69.85 0 top
U$172  [(QWIIC)]  16.13,70.74 0 bottom
U$173  [ROBOTIC0]  17.65,78.36 0 bottom
U$174  [SENSOR2]  17.53,75.06 0 bottom
U$175  [FINGER0]  17.14,76.71 0 bottom
U$176  SPARKX-LOGO3  [SPARKX-SMALL]  27.3,68.58 0 bottom
U$177  STAND-OFF  [STAND-OFF-#2]  21.72,69.85 0 top
U$178  STAND-OFF  [STAND-OFF-#2]  32.89,69.85 0 top
U$179  [(QWIIC)]  30.1,70.74 0 bottom
U$180  [ROBOTIC0]  31.62,78.36 0 bottom
U$181  [SENSOR2]  31.5,75.06 0 bottom
U$182  [FINGER0]  31.12,76.71 0 bottom
U$183  SPARKX-LOGO3  [SPARKX-SMALL]  41.27,68.58 0 bottom
U$184  STAND-OFF  [STAND-OFF-#2]  35.69,69.85 0 top
U$185  STAND-OFF  [STAND-OFF-#2]  46.86,69.85 0 top
U$186  [(QWIIC)]  44.07,70.74 0 bottom
U$187  [ROBOTIC0]  45.59,78.36 0 bottom
U$188  [SENSOR2]  45.47,75.06 0 bottom
U$189  [FINGER0]  45.09,76.71 0 bottom
U$190  SPARKX-LOGO3  [SPARKX-SMALL]  55.25,68.58 0 bottom
U$191  STAND-OFF  [STAND-OFF-#2]  49.66,69.85 0 top
U$192  STAND-OFF  [STAND-OFF-#2]  60.83,69.85 0 top
U$193  [(QWIIC)]  58.04,70.74 0 bottom
U$194  [ROBOTIC0]  59.56,78.36 0 bottom
U$195  [SENSOR2]  59.44,75.06 0 bottom
U$196  [FINGER0]  59.05,76.71 0 bottom
U$197  SPARKX-LOGO3  [SPARKX-SMALL]  69.22,68.58 0 bottom
U$198  STAND-OFF  [STAND-OFF-#2]  63.63,69.85 0 top
U$199  STAND-OFF  [STAND-OFF-#2]  74.8,69.85 0 top
U$200  [(QWIIC)]  72.01,70.74 0 bottom
U$201  [ROBOTIC0]  73.53,78.36 0 bottom
U$202  [SENSOR2]  73.41,75.06 0 bottom
U$203  [FINGER0]  73.02,76.71 0 bottom
U$204  SPARKX-LOGO3  [SPARKX-SMALL]  83.18,68.58 0 bottom
U$205  STAND-OFF  [STAND-OFF-#2]  77.6,69.85 0 top
U$206  STAND-OFF  [STAND-OFF-#2]  88.77,69.85 0 top
U$207  [(QWIIC)]  85.98,70.74 0 bottom
U$208  [ROBOTIC0]  87.5,78.36 0 bottom
U$209  [SENSOR2]  87.38,75.06 0 bottom
U$210  [FINGER0]  86.99,76.71 0 bottom

## Library data of the parts
C1 C3 C7 C10 C13 C16 C19 C22 C25 C28 C31 C34 C37 C40 C43 C46 C49 C52 C55 C58 C61 C64 C67 C70 C73 C76 C79 C82 C85 C88 = SparkFun-Capacitors; PROD_ID: CAP-08280
C2 C4-C6 C8 C9 C11 C12 C14 C15 C17 C18 C20 C21 C23 C24 C26 C27 C29 C30 C32 C33 C35 C36 C38 C39 C41 C42 C44 C45 C47 C48 C50 C51 C53 C54 C56 C57 C59 C60 C62 C63 C65 C66 C68 C69 C71 C72 C74 C75 C77 C78 C80 C81 C83 C84 C86 C87 C89 C90 = SparkFun-Capacitors; PROD_ID: CAP-00810
E$1 E$2 FD1-FD60 = SparkFun-Aesthetics
E$3 = SparkFun-Retired
J1-J30 U1 U3 U5 U7 U9 U11 U13 U15 U17 U19 U21 U23 U25 U27 U29 U31 U33 U35 U37 U39 U41 U43 U45 U47 U49 U51 U53 U55 U57 U59 U$1-U$5 U$8 U$15-U$17 U$22-U$24 U$29-U$31 U$36-U$38 U$43-U$45 U$50-U$52 U$57-U$59 U$64-U$66 U$71-U$73 U$78-U$80 U$85-U$87 U$92-U$94 U$99-U$101 U$106-U$108 U$113-U$115 U$120-U$122 U$127-U$129 U$134-U$136 U$141-U$143 U$148-U$150 U$155-U$157 U$162-U$164 U$169-U$171 U$176-U$178 U$183-U$185 U$190-U$192 U$197-U$199 U$204-U$206 = SparkX
R1-R60 = SparkFun-Resistors; PROD_ID: RES-08272
U2 U4 U6 U8 U10 U12 U14 U16 U18 U20 U22 U24 U26 U28 U30 U32 U34 U36 U38 U40 U42 U44 U46 U48 U50 U52 U54 U56 U58 U60 = LPS25HB
U$6 U$7 U$12 U$13 U$19 U$20 U$26 U$27 U$33 U$34 U$40 U$41 U$47 U$48 U$54 U$55 U$61 U$62 U$68 U$69 U$75 U$76 U$82 U$83 U$89 U$90 U$96 U$97 U$103 U$104 U$110 U$111 U$117 U$118 U$124 U$125 U$131 U$132 U$138 U$139 U$145 U$146 U$152 U$153 U$159 U$160 U$166 U$167 U$173 U$174 U$180 U$181 U$187 U$188 U$194 U$195 U$201 U$202 U$208 U$209 = buzzard_labels
U$9 U$14 U$21 U$28 U$35 U$42 U$49 U$56 U$63 U$70 U$77 U$84 U$91 U$98 U$105 U$112 U$119 U$126 U$133 U$140 U$147 U$154 U$161 U$168 U$175 U$182 U$189 U$196 U$203 U$210 = buzzard_labels (1)
U$10 U$11 U$18 U$25 U$32 U$39 U$46 U$53 U$60 U$67 U$74 U$81 U$88 U$95 U$102 U$109 U$116 U$123 U$130 U$137 U$144 U$151 U$158 U$165 U$172 U$179 U$186 U$193 U$200 U$207 = Labels-0_04

## Nets
3.3V: C1.1 C2.1 C4.1 J2.2 R1.2 R2.2 U1.3 U1.4 U2.1 U2.5 U2.6 U2.10
3.3V1: C3.1 C5.1 C6.1 J1.2 R3.2 R4.2 U3.3 U3.4 U4.1 U4.5 U4.6 U4.10
3.3V2: C7.1 C8.1 C9.1 J3.2 R5.2 R6.2 U5.3 U5.4 U6.1 U6.5 U6.6 U6.10
3.3V3: C10.1 C11.1 C12.1 J4.2 R7.2 R8.2 U7.3 U7.4 U8.1 U8.5 U8.6 U8.10
3.3V4: C13.1 C14.1 C15.1 J5.2 R9.2 R10.2 U9.3 U9.4 U10.1 U10.5 U10.6 U10.10
3.3V5: C16.1 C17.1 C18.1 J6.2 R11.2 R12.2 U11.3 U11.4 U12.1 U12.5 U12.6 U12.10
3.3V6: C19.1 C20.1 C21.1 J7.2 R13.2 R14.2 U13.3 U13.4 U14.1 U14.5 U14.6 U14.10
3.3V7: C22.1 C23.1 C24.1 J8.2 R15.2 R16.2 U15.3 U15.4 U16.1 U16.5 U16.6 U16.10
3.3V8: C25.1 C26.1 C27.1 J9.2 R17.2 R18.2 U17.3 U17.4 U18.1 U18.5 U18.6 U18.10
3.3V9: C28.1 C29.1 C30.1 J10.2 R19.2 R20.2 U19.3 U19.4 U20.1 U20.5 U20.6 U20.10
3.3V10: C31.1 C32.1 C33.1 J11.2 R21.2 R22.2 U21.3 U21.4 U22.1 U22.5 U22.6 U22.10
3.3V11: C34.1 C35.1 C36.1 J12.2 R23.2 R24.2 U23.3 U23.4 U24.1 U24.5 U24.6 U24.10
3.3V12: C37.1 C38.1 C39.1 J13.2 R25.2 R26.2 U25.3 U25.4 U26.1 U26.5 U26.6 U26.10
3.3V13: C40.1 C41.1 C42.1 J14.2 R27.2 R28.2 U27.3 U27.4 U28.1 U28.5 U28.6 U28.10
3.3V14: C43.1 C44.1 C45.1 J15.2 R29.2 R30.2 U29.3 U29.4 U30.1 U30.5 U30.6 U30.10
3.3V15: C46.1 C47.1 C48.1 J16.2 R31.2 R32.2 U31.3 U31.4 U32.1 U32.5 U32.6 U32.10
3.3V16: C49.1 C50.1 C51.1 J17.2 R33.2 R34.2 U33.3 U33.4 U34.1 U34.5 U34.6 U34.10
3.3V17: C52.1 C53.1 C54.1 J18.2 R35.2 R36.2 U35.3 U35.4 U36.1 U36.5 U36.6 U36.10
3.3V18: C55.1 C56.1 C57.1 J19.2 R37.2 R38.2 U37.3 U37.4 U38.1 U38.5 U38.6 U38.10
3.3V19: C58.1 C59.1 C60.1 J20.2 R39.2 R40.2 U39.3 U39.4 U40.1 U40.5 U40.6 U40.10
3.3V20: C61.1 C62.1 C63.1 J21.2 R41.2 R42.2 U41.3 U41.4 U42.1 U42.5 U42.6 U42.10
3.3V21: C64.1 C65.1 C66.1 J22.2 R43.2 R44.2 U43.3 U43.4 U44.1 U44.5 U44.6 U44.10
3.3V22: C67.1 C68.1 C69.1 J23.2 R45.2 R46.2 U45.3 U45.4 U46.1 U46.5 U46.6 U46.10
3.3V23: C70.1 C71.1 C72.1 J24.2 R47.2 R48.2 U47.3 U47.4 U48.1 U48.5 U48.6 U48.10
3.3V24: C73.1 C74.1 C75.1 J25.2 R49.2 R50.2 U49.3 U49.4 U50.1 U50.5 U50.6 U50.10
3.3V25: C76.1 C77.1 C78.1 J26.2 R51.2 R52.2 U51.3 U51.4 U52.1 U52.5 U52.6 U52.10
3.3V26: C79.1 C80.1 C81.1 J27.2 R53.2 R54.2 U53.3 U53.4 U54.1 U54.5 U54.6 U54.10
3.3V27: C82.1 C83.1 C84.1 J28.2 R55.2 R56.2 U55.3 U55.4 U56.1 U56.5 U56.6 U56.10
3.3V28: C85.1 C86.1 C87.1 J29.2 R57.2 R58.2 U57.3 U57.4 U58.1 U58.5 U58.6 U58.10
3.3V29: C88.1 C89.1 C90.1 J30.2 R59.2 R60.2 U59.3 U59.4 U60.1 U60.5 U60.6 U60.10
GND: C1.2 C2.2 C4.2 J2.1 U1.1 U2.3 U2.8 U2.9
GND1: C3.2 C5.2 C6.2 J1.1 U3.1 U4.3 U4.8 U4.9
GND2: C7.2 C8.2 C9.2 J3.1 U5.1 U6.3 U6.8 U6.9
GND3: C10.2 C11.2 C12.2 J4.1 U7.1 U8.3 U8.8 U8.9
GND4: C13.2 C14.2 C15.2 J5.1 U9.1 U10.3 U10.8 U10.9
GND5: C16.2 C17.2 C18.2 J6.1 U11.1 U12.3 U12.8 U12.9
GND6: C19.2 C20.2 C21.2 J7.1 U13.1 U14.3 U14.8 U14.9
GND7: C22.2 C23.2 C24.2 J8.1 U15.1 U16.3 U16.8 U16.9
GND8: C25.2 C26.2 C27.2 J9.1 U17.1 U18.3 U18.8 U18.9
GND9: C28.2 C29.2 C30.2 J10.1 U19.1 U20.3 U20.8 U20.9
GND10: C31.2 C32.2 C33.2 J11.1 U21.1 U22.3 U22.8 U22.9
GND11: C34.2 C35.2 C36.2 J12.1 U23.1 U24.3 U24.8 U24.9
GND12: C37.2 C38.2 C39.2 J13.1 U25.1 U26.3 U26.8 U26.9
GND13: C40.2 C41.2 C42.2 J14.1 U27.1 U28.3 U28.8 U28.9
GND14: C43.2 C44.2 C45.2 J15.1 U29.1 U30.3 U30.8 U30.9
GND15: C46.2 C47.2 C48.2 J16.1 U31.1 U32.3 U32.8 U32.9
GND16: C49.2 C50.2 C51.2 J17.1 U33.1 U34.3 U34.8 U34.9
GND17: C52.2 C53.2 C54.2 J18.1 U35.1 U36.3 U36.8 U36.9
GND18: C55.2 C56.2 C57.2 J19.1 U37.1 U38.3 U38.8 U38.9
GND19: C58.2 C59.2 C60.2 J20.1 U39.1 U40.3 U40.8 U40.9
GND20: C61.2 C62.2 C63.2 J21.1 U41.1 U42.3 U42.8 U42.9
GND21: C64.2 C65.2 C66.2 J22.1 U43.1 U44.3 U44.8 U44.9
GND22: C67.2 C68.2 C69.2 J23.1 U45.1 U46.3 U46.8 U46.9
GND23: C70.2 C71.2 C72.2 J24.1 U47.1 U48.3 U48.8 U48.9
GND24: C73.2 C74.2 C75.2 J25.1 U49.1 U50.3 U50.8 U50.9
GND25: C76.2 C77.2 C78.2 J26.1 U51.1 U52.3 U52.8 U52.9
GND26: C79.2 C80.2 C81.2 J27.1 U53.1 U54.3 U54.8 U54.9
GND27: C82.2 C83.2 C84.2 J28.1 U55.1 U56.3 U56.8 U56.9
GND28: C85.2 C86.2 C87.2 J29.1 U57.1 U58.3 U58.8 U58.9
GND29: C88.2 C89.2 C90.2 J30.1 U59.1 U60.3 U60.8 U60.9
N$1: U1.2 U1.5
N$2: U3.2 U3.5
N$3: U5.2 U5.5
N$4: U7.2 U7.5
N$5: U9.2 U9.5
N$6: U11.2 U11.5
N$7: U13.2 U13.5
N$8: U15.2 U15.5
N$9: U17.2 U17.5
N$10: U19.2 U19.5
N$11: U21.2 U21.5
N$12: U23.2 U23.5
N$13: U25.2 U25.5
N$14: U27.2 U27.5
N$15: U29.2 U29.5
N$16: U31.2 U31.5
N$17: U33.2 U33.5
N$18: U35.2 U35.5
N$19: U37.2 U37.5
N$20: U39.2 U39.5
N$21: U41.2 U41.5
N$22: U43.2 U43.5
N$23: U45.2 U45.5
N$24: U47.2 U47.5
N$25: U49.2 U49.5
N$26: U51.2 U51.5
N$27: U53.2 U53.5
N$28: U55.2 U55.5
N$29: U57.2 U57.5
N$30: U59.2 U59.5
SCL/SCK: J2.4 R1.1 U1.8 U2.2
SCL/SCK1: J1.4 R3.1 U3.8 U4.2
SCL/SCK2: J3.4 R5.1 U5.8 U6.2
SCL/SCK3: J4.4 R7.1 U7.8 U8.2
SCL/SCK4: J5.4 R9.1 U9.8 U10.2
SCL/SCK5: J6.4 R11.1 U11.8 U12.2
SCL/SCK6: J7.4 R13.1 U13.8 U14.2
SCL/SCK7: J8.4 R15.1 U15.8 U16.2
SCL/SCK8: J9.4 R17.1 U17.8 U18.2
SCL/SCK9: J10.4 R19.1 U19.8 U20.2
SCL/SCK10: J11.4 R21.1 U21.8 U22.2
SCL/SCK11: J12.4 R23.1 U23.8 U24.2
SCL/SCK12: J13.4 R25.1 U25.8 U26.2
SCL/SCK13: J14.4 R27.1 U27.8 U28.2
SCL/SCK14: J15.4 R29.1 U29.8 U30.2
SCL/SCK15: J16.4 R31.1 U31.8 U32.2
SCL/SCK16: J17.4 R33.1 U33.8 U34.2
SCL/SCK17: J18.4 R35.1 U35.8 U36.2
SCL/SCK18: J19.4 R37.1 U37.8 U38.2
SCL/SCK19: J20.4 R39.1 U39.8 U40.2
SCL/SCK20: J21.4 R41.1 U41.8 U42.2
SCL/SCK21: J22.4 R43.1 U43.8 U44.2
SCL/SCK22: J23.4 R45.1 U45.8 U46.2
SCL/SCK23: J24.4 R47.1 U47.8 U48.2
SCL/SCK24: J25.4 R49.1 U49.8 U50.2
SCL/SCK25: J26.4 R51.1 U51.8 U52.2
SCL/SCK26: J27.4 R53.1 U53.8 U54.2
SCL/SCK27: J28.4 R55.1 U55.8 U56.2
SCL/SCK28: J29.4 R57.1 U57.8 U58.2
SCL/SCK29: J30.4 R59.1 U59.8 U60.2
SDA/MOSI: J2.3 R2.1 U1.7 U2.4
SDA/MOSI1: J1.3 R4.1 U3.7 U4.4
SDA/MOSI2: J3.3 R6.1 U5.7 U6.4
SDA/MOSI3: J4.3 R8.1 U7.7 U8.4
SDA/MOSI4: J5.3 R10.1 U9.7 U10.4
SDA/MOSI5: J6.3 R12.1 U11.7 U12.4
SDA/MOSI6: J7.3 R14.1 U13.7 U14.4
SDA/MOSI7: J8.3 R16.1 U15.7 U16.4
SDA/MOSI8: J9.3 R18.1 U17.7 U18.4
SDA/MOSI9: J10.3 R20.1 U19.7 U20.4
SDA/MOSI10: J11.3 R22.1 U21.7 U22.4
SDA/MOSI11: J12.3 R24.1 U23.7 U24.4
SDA/MOSI12: J13.3 R26.1 U25.7 U26.4
SDA/MOSI13: J14.3 R28.1 U27.7 U28.4
SDA/MOSI14: J15.3 R30.1 U29.7 U30.4
SDA/MOSI15: J16.3 R32.1 U31.7 U32.4
SDA/MOSI16: J17.3 R34.1 U33.7 U34.4
SDA/MOSI17: J18.3 R36.1 U35.7 U36.4
SDA/MOSI18: J19.3 R38.1 U37.7 U38.4
SDA/MOSI19: J20.3 R40.1 U39.7 U40.4
SDA/MOSI20: J21.3 R42.1 U41.7 U42.4
SDA/MOSI21: J22.3 R44.1 U43.7 U44.4
SDA/MOSI22: J23.3 R46.1 U45.7 U46.4
SDA/MOSI23: J24.3 R48.1 U47.7 U48.4
SDA/MOSI24: J25.3 R50.1 U49.7 U50.4
SDA/MOSI25: J26.3 R52.1 U51.7 U52.4
SDA/MOSI26: J27.3 R54.1 U53.7 U54.4
SDA/MOSI27: J28.3 R56.1 U55.7 U56.4
SDA/MOSI28: J29.3 R58.1 U57.7 U58.4
SDA/MOSI29: J30.3 R60.1 U59.7 U60.4